# EAGLE board HeadphoneSlice (EAGLE 7.5.0)
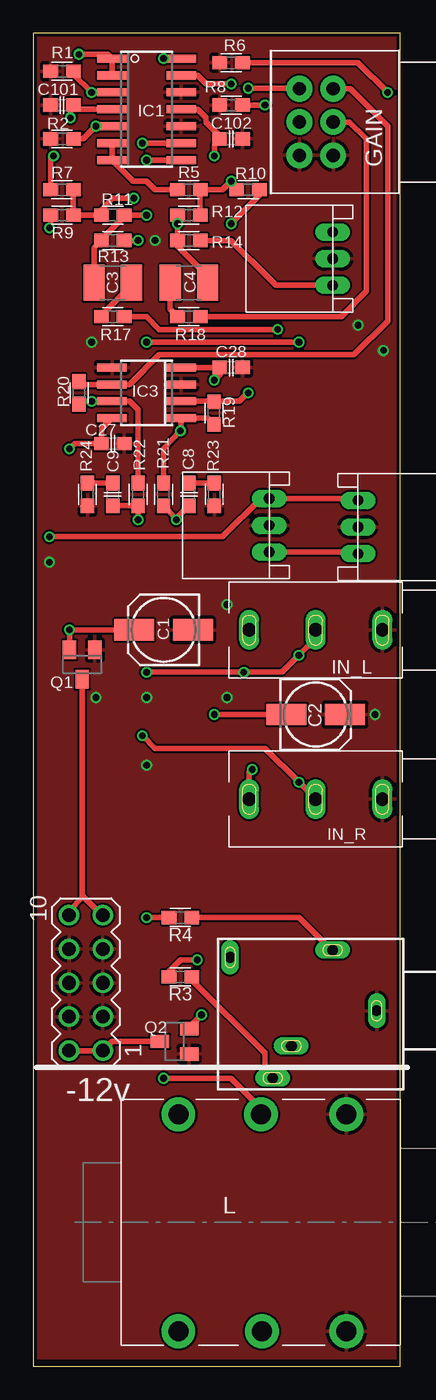
[diagram p0: board, top side]
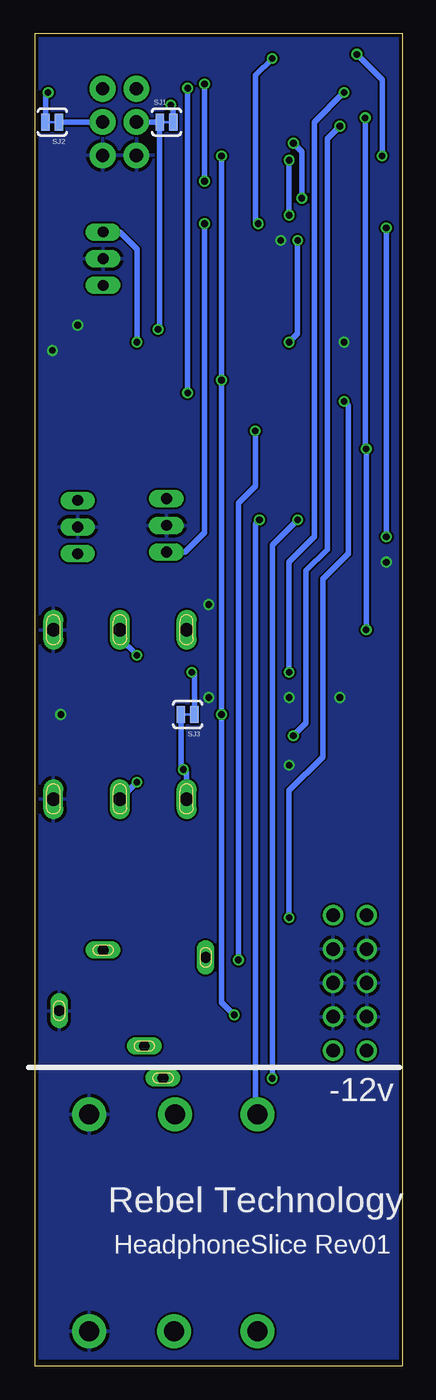
[diagram p1: board, bottom side, seen from below]

Size 27.56 x 100 mm. Coordinates in mm from the lower left corner, seen from the top.
Outline: 27.56,0 27.56,100 0,100 0,0 27.56,0
Copper layers (1*16): Top 0.035mm / dielectric 1.5mm / Bottom 0.035mm
Design rules "SeeedStudio_2layer_DRU_no_angle_20140221": minimum track width 6mil, minimum drill 12mil, track to track 6mil, track to pad 6mil, pad to pad 6mil, via to via 6mil, smd to smd 0mil, copper to edge 10mil, drill to drill 10mil, minimum pad ring 10mil, minimum via ring 6mil, stop-mask expansion 2mil, vias tented up to drill 100mil, thermal gap 10mil

## Footprints (pad centres in the part's own frame; a part is rotated, then mirrored left to right if it is on the bottom)
CON-JST_PH_3W = drill 0.8 long: P1 0,0; P2 -2,0; P3 -4,0
153CLV-0505 = smd 3 x 1.6: + 2.2,0; - -2.2,0
C1210 = smd 1.6 x 2.7: 1 -1.4,0; 2 1.4,0
C0603 = smd 1.1 x 1: 1 -0.85,0; 2 0.85,0
POT-BOURNS-PTD902 = drill 1 pad 1.93: 1 -2.5,-0.036; 2 0,-0.036; 3 2.5,-0.036; 4 -2.5,2.5; 5 0,2.5; 6 2.5,2.5
SO14 = smd 0.6 x 2.2: 1 -3.81,-2.6; 2 -2.54,-2.6; 3 -1.27,-2.6; 4 0,-2.6; 5 1.27,-2.6; 6 2.54,-2.6; 7 3.81,-2.6; 8 3.81,2.6; 9 2.54,2.6; 10 1.27,2.6; 11 0,2.6; 12 -1.27,2.6; 13 -2.54,2.6; 14 -3.81,2.6
SO08 = smd 0.6 x 2.2: 1 -1.905,-2.6; 2 -0.635,-2.6; 3 0.635,-2.6; 4 1.905,-2.6; 5 1.905,2.6; 6 0.635,2.6; 7 -0.635,2.6; 8 -1.905,2.6
UJ-3502-R-SLOT = drill 1 long: P$1 0,0; P$2 0,5; P$3 0,-5
NMJ6HCD2 = drill 1.5 pad 2.54: R -0.318,8.096; RN -0.238,-8.176; S 6.112,8.096; SN 6.112,-8.176; T -6.509,8.096; TN -6.509,-8.176
SOT23 = smd 1 x 1.4: 1 -0.95,-1.1; 2 0.95,-1.1; 3 0,1.1
0603 = smd 1.1 x 1: 1 -0.85,0; 2 0.85,0
SJ_2S-TRACE = smd 0.635 x 1.27: 1 -0.508,0; 2 0.508,0
MA05-2 = drill 1.016: 1 -5.08,-1.27; 2 -5.08,1.27; 3 -2.54,-1.27; 4 -2.54,1.27; 5 0,-1.27; 6 0,1.27; 7 2.54,-1.27; 8 2.54,1.27; 9 5.08,-1.27; 10 5.08,1.27
1503_09 = drill 0.8 pad 1.2 long: 1 0,-2.1; 2 -4.55,-5.4; 3 5.05,-9.9; 4 -4,-13.1; 5 2.65,-8.5

## Placement (x,y rotation side)
3I  CON-JST_PH_3W  [CON-JST_PH_3W]  24.38,60.96 270 top
3INV  CON-JST_PH_3W  [CON-JST_PH_3W]  22.48,85.09 90 top
3O  CON-JST_PH_3W  [CON-JST_PH_3W]  17.72,65.09 90 top
C1  10u  [153CLV-0505]  9.78,55.24 180 top
C2  10u  [153CLV-0505]  21.21,48.9 0 top
C3  1u Polyester  [C1210]  5.97,81.28 0 top
C4  1u Polyester  [C1210]  11.68,81.28 180 top
C8  47n  [C0603]  11.68,65.41 90 top
C9  47n  [C0603]  5.97,65.41 90 top
C27  100n  [C0603]  5.97,69.22 0 top
C28  100n  [C0603]  14.86,74.93 0 top
C101  100n  [C0603]  2.16,94.61 180 top
C102  100n  [C0603]  14.86,92.08 0 top
GAIN  POT-BOURNS-PTD902  [POT-BOURNS-PTD902]  22.48,93.34 90 top
IC1  QUAD_OPAMPD  [SO14]  8.51,94.3 270 top
IC3  RC4560  [SO08]  8.51,73.03 90 top
IN_L  JACK-UJ-3502-RSLOT  [UJ-3502-R-SLOT]  21.21,55.24 90 top
IN_R  JACK-UJ-3502-RSLOT  [UJ-3502-R-SLOT]  21.21,42.55 90 top
L  NEUTRIK_NMJ6HCD2  [NMJ6HCD2]  17.4,10.79 0 top
Q1  SI2309CDS  [SOT23]  3.67,52.64 180 top
Q2  BSS123  [SOT23]  10.6,24.37 90 top
R1  1M  [0603]  2.16,97.16 180 top
R2  1M  [0603]  2.16,92.08 180 top
R3  100R  [0603]  11.05,29.21 180 top
R4  100R  [0603]  11.05,33.66 180 top
R5  100k  [0603]  11.68,88.27 180 top
R6  2k7  [0603]  14.86,97.79 180 top
R7  100k  [0603]  2.16,88.27 180 top
R8  2k7  [0603]  14.86,94.61 180 top
R9  100k  [0603]  2.16,86.36 180 top
R10  100k  [0603]  16.13,88.27 0 top
R11  100k  [0603]  5.97,86.36 0 top
R12  100k  [0603]  11.68,86.36 180 top
R13  1k  [0603]  5.97,84.45 0 top
R14  1k  [0603]  11.68,84.45 0 top
R17  22k  [0603]  5.97,78.74 180 top
R18  22k  [0603]  11.68,78.74 180 top
R19  10k  [0603]  13.57,71.5 90 top
R20  10k  [0603]  3.43,73.03 90 top
R21  22R  [0603]  9.78,65.41 90 top
R22  22R  [0603]  7.87,65.41 90 top
R23  10R  [0603]  13.59,65.41 90 top
R24  10R  [0603]  4.06,65.41 90 top
SJ1  SOLDERJUMPERTRACE  [SJ_2S-TRACE]  17.72,93.34 0 bottom
SJ2  SOLDERJUMPERTRACE  [SJ_2S-TRACE]  26.29,93.34 180 bottom
SJ3  SOLDERJUMPERTRACE  [SJ_2S-TRACE]  16.13,48.9 180 bottom
SV1  [MA05-2]  3.95,28.75 90 top
X1  1503_09  [1503_09]  27.88,26.67 270 top

## Library data of the parts
3I 3INV 3O C3 C4 C8 C9 C27 C28 C101 C102 GAIN IN_L IN_R R1-R14 R17-R24 = Rebel
C1 C2 = rcl
IC1 = adafruit
IC3 = linear
L = neutrik_jacks
Q1 Q2 = transistor-small-signal
SJ1-SJ3 = SparkFun
SV1 = con-lstb; OC_FARNELL: unknown; OC_NEWARK: unknown
X1 = con-lumberg; OC_FARNELL: 1243244; OC_NEWARK: unknown

## Nets
+12V: C1.+ C27.1 C101.1 IC1.4 IC3.8 Q1.2
-12V: C2.- C28.1 C102.1 IC1.11 IC3.4 Q2.2
BUS_IN_L: 3I.P3 3O.P1 R9.2
BUS_IN_R: 3I.P1 3O.P3 R10.2
GND: 3I.P2 3INV.P2 3O.P2 C1.- C2.+ C27.2 C28.2 C101.2 C102.2 GAIN.1 GAIN.4 IC1.10 IC1.12 IC3.3 IC3.5 IN_L.P$3 IN_R.P$3 L.S L.SN Q1.1 Q2.1 R1.2 R2.2 R6.2 R8.2 R23.1 R24.1 SV1.3 SV1.4 SV1.5 SV1.6 SV1.7 SV1.8 X1.1
HP_L: C8.1 L.T R21.1
HP_R: C9.1 L.R R22.1
IN_B1: IN_R.P$2 SJ3.2
IN_L: IC1.3 IN_L.P$1 R1.1 SJ3.1
IN_R: IC1.5 IN_R.P$1 R2.1
INV_L: 3INV.P1 R13.2
INV_R: 3INV.P3 R14.2
LINE_L: R3.1 X1.3
LINE_R: R4.1 X1.2
N$1: Q2.3 SV1.1 SV1.2
N$2: IC3.7 R4.2 R20.1 R22.2
N$3: GAIN.6 IC3.2 R19.2
N$4: C4.2 R18.2
N$5: GAIN.5 R17.1 SJ1.1
N$6: GAIN.2 R18.1 SJ2.1
N$7: C4.1 IC1.14 R12.2 R14.1
N$8: C3.2 R17.2
N$9: R8.1 SJ1.2
N$10: C3.1 IC1.8 R11.2 R13.1
N$11: IC1.6 IC1.7 R5.2
N$12: C9.2 R24.2
N$13: IC1.1 IC1.2 R7.2
N$14: Q1.3 SV1.9 SV1.10
N$15: R6.1 SJ2.2
N$16: GAIN.3 IC3.6 R20.2
N$19: IC3.1 R3.2 R19.1 R21.2
N$21: C8.2 R23.2
N$45: IC1.13 R5.1 R10.1 R12.1
N$50: IC1.9 R7.1 R9.1 R11.1

## Tracks (layer width: path | path; a pad name or v marks a point on that pad's centre or on a via)
+12V  (via drill 0.5)
  Top 0.406: Q1.2 v2.72,55.24 C1.+ | IC3.8 5.12,70.33 C27.1 3.11,69.22 v2.72,68.82 | IC1.4 3.33,94.3 C101.1 2.79,94.4 v2.79,93.66
  Bottom 0.406: v2.72,55.24 v2.72,68.82 2.79,68.9 v2.79,93.66
-12V  (via drill 0.5)
  Top 0.406: IC1.11 12.32,94.3 12.95,93.66 12.95,93.34 14.01,92.29 C102.1 13.59,91.66 v13.59,90.81 | IC3.4 C28.1 14.01,74.4 v13.59,73.98 | Q2.2 11.7,25.42 v12.64,26.35 | C2.- v13.59,48.9
  Bottom 0.406: v13.59,90.81 v13.59,73.98 v13.59,48.9 13.59,27.3 v12.64,26.35
BUS_IN_L  (via drill 0.5)
  Top 0.406: R9.2 1.31,85.51 v1.21,85.41 | v1.21,62.23 14.22,62.23 17.08,65.09 3O.P1 24.26,65.09 3I.P3
  Bottom 0.406: v1.21,62.23 v1.21,85.41
BUS_IN_R  (via drill 0.5)
  Top 0.406: R10.2 16.98,87.84 v14.86,85.72 | 3O.P3 24.26,61.09 3I.P1
  Bottom 0.406: v14.86,85.72 14.86,62.55 16.32,61.09 3O.P3
GND  (via drill 0.5)
  other vias: 8.51,45.09 4.7,50.16 14.54,57.15 9.14,84.45 24.38,78.11 1.21,60.33 26.29,76.2 4.38,76.83 8.51,50.16 14.54,50.16 25.65,48.9
  pour Bottom: -9.27,0.64 35.18,0.64 35.18,100.97 -9.27,100.97
  pour Top: -8,0.64 36.45,0.64 36.45,100.97 -8,100.97
HP_L  (via drill 0.5)
  Top 0.406: v10.73,63.5 10.73,63.6 | 10.73,63.6 R21.1 | 10.73,63.6 C8.1
  Bottom 0.406: v10.73,63.5 11.05,63.18 11.05,19.37 L.T
HP_R  (via drill 0.5)
  Top 0.406: C9.1 R22.1 v7.87,63.5 | L.R 17.56,18.89 14.86,21.59 v9.78,21.59
  Bottom 0.406: v7.87,63.5 9.78,61.59 v9.78,21.59
IN_B1  (via drill 0.5)
  Top 0.406: IN_R.P$2 16.21,44.53 v16.45,44.77
  Bottom 0.406: SJ3.2 16.64,44.96 v16.45,44.77 16.21,44.53 IN_R.P$2
IN_L  (via drill 0.5)
  Top 0.406: R1.1 3.01,96.94 v4.38,95.57 IC1.3 | v8.51,52.07 v15.81,52.07 18.67,52.07 v19.94,53.34 21.21,54.61 IN_L.P$1
  Bottom 0.406: v8.51,52.07 8.51,60.33 6.6,62.23 6.6,93.34 v4.38,95.57 | SJ3.1 15.62,51.88 v15.81,52.07 | IN_L.P$1 21.21,54.61 v19.94,53.34
IN_R  (via drill 0.5)
  Top 0.406: R2.1 3.75,92.08 v4.7,93.03 IC1.5 | v8.19,47.31 9.14,46.35 17.4,46.35 v19.94,43.81 IN_R.P$1
  Bottom 0.406: v8.19,47.31 7.24,48.26 7.24,59.69 5.65,61.28 5.65,92.08 v4.7,93.03 | IN_R.P$1 v19.94,43.81
INV_L  (via drill 0.5)
  Top 0.406: R13.2 v7.87,84.45 | v8.51,76.83 v19.94,76.83
  Bottom 0.406: v7.87,84.45 7.87,77.47 v8.51,76.83 | 3INV.P1 21.21,85.09 19.94,83.82 v19.94,76.83
INV_R
  Top 0.406: R14.2 14.86,84.45 17.72,81.6 18.03,81.28 18.22,81.09 3INV.P3
LINE_L
  Top 0.406: R3.1 11.9,29 17.4,23.5 17.4,22.2 X1.3
LINE_R
  Top 0.406: R4.1 19.94,33.66 22.37,31.22 X1.2
N$1
  Top 0.406: SV1.2 SV1.1 5.91,24.37 Q2.3
N$2  (via drill 0.5)
  Top 0.406: R20.1 3.64,72.39 v4.38,72.39 IC3.7 7.24,72.39 7.87,71.75 R22.2 | v8.51,33.66 R4.2
  Bottom 0.406: v4.38,72.39 4.06,72.07 4.06,60.96 5.97,59.05 5.97,45.72 8.51,43.18 v8.51,33.66
N$3  (via drill 0.5)
  Top 0.406: IC3.2 13.53,72.39 R19.2 14.24,72.39 15.49,72.39 v16.13,73.03 | v16.13,95.89 20.57,95.89 GAIN.6
  Bottom 0.406: v16.13,95.89 v16.13,73.03
N$4
  Top 0.406: C4.2 10.28,79.29 R18.2
N$5  (via drill 0.5)
  Top 0.406: R17.1 8.51,78.74 9.46,77.79 v18.35,77.79
  Bottom 0.406: GAIN.5 SJ1.1 18.22,77.92 v18.35,77.79
N$6
  Top 0.406: R18.1 23.11,78.74 25.02,80.64 25.02,92.08 23.75,93.34 GAIN.2
  Bottom 0.406: SJ2.1 GAIN.2
N$7  (via drill 0.5)
  Top 0.406: R12.2 v10.83,85.72 R14.1 10.83,84.03 13.08,81.78 C4.1 | v9.78,98.11 IC1.14
  Bottom 0.406: v10.83,85.72 11.05,85.94 11.05,96.84 v9.78,98.11
N$8
  Top 0.406: R17.2 5.12,78.84 7.37,81.09 C3.2
N$9  (via drill 0.5)
  Top 0.406: R8.1 v17.4,94.61
  Bottom 0.406: SJ1.2 17.21,94.42 v17.4,94.61
N$10  (via drill 0.5)
  Top 0.406: IC1.8 v8.51,90.49 | C3.1 4.57,83.91 R13.1 5.12,84.56 6.82,86.26 R11.2 v8.51,86.36
  Bottom 0.406: v8.51,90.49 v8.51,86.36
N$11
  Top 0.406: R5.2 9.14,88.27 8.51,88.9 7.5,88.9 IC1.7 IC1.6
N$12
  Top 0.406: C9.2 R24.2
N$13  (via drill 0.5)
  Top 0.406: IC1.2 IC1.1 5.59,98.42 v3.43,98.42 | R7.2 1.31,90.59 v1.52,90.81
  Bottom 0.406: v1.52,90.81 1.52,96.52 v3.43,98.42
N$14
  Top 0.406: SV1.9 5.15,33.84 3.75,35.24 | 3.75,35.24 3.67,35.32 Q1.3 | SV1.10 2.68,34.17 3.75,35.24
N$15  (via drill 0.5)
  Top 0.406: R6.1 24.38,97.79 v26.61,95.57
  Bottom 0.406: SJ2.2 26.8,95.38 v26.61,95.57
N$16
  Top 0.406: R20.2 3.33,73.66 IC3.6 7.24,73.66 9.46,75.88 24.07,75.88 26.61,78.42 26.61,93.03 23.79,95.84 GAIN.3
N$19  (via drill 0.5)
  Top 0.406: R19.1 13.1,71.12 IC3.1 11.11,70.23 v11.05,70.17 10.99,70.11 9.78,68.84 R21.2 | v12.32,30.48 11.05,30.48 10.2,29.63 R3.2
  Bottom 0.406: v11.05,70.17 11.05,66.04 12.32,64.77 v12.32,30.48
N$21
  Top 0.406: R23.2 C8.2
N$45  (via drill 0.5)
  Top 0.406: R12.1 R5.1 14.22,88.27 v14.86,88.9 14.86,88.69 R10.1 | IC1.13 12.32,96.84 12.95,96.2 v14.86,96.2
  Bottom 0.406: v14.86,96.2 v14.86,88.9
N$50  (via drill 0.5)
  Top 0.406: IC1.9 v8.19,91.76 | R7.1 R9.1 R11.1 5.12,86.78 5.97,87.63 v7.56,87.63
  Bottom 0.406: v8.19,91.76 7.56,91.12 v7.56,87.63

## Text on the board
tPlace: -12v
bPlace: -12v | Rebel Technology | HeadphoneSlice Rev01